# Altium PCB nRF2789_Dual Wireless Mic RX_V_1_0.PcbDoc
Units mil, origin at the board's own origin, x right, y up, seen from the top; angles counter-clockwise.
Board outline 2910 x 2000 mil, 2 copper layers (Top Layer, Bottom Layer); 112 components, 80 nets, 386 pads, 429 vias.
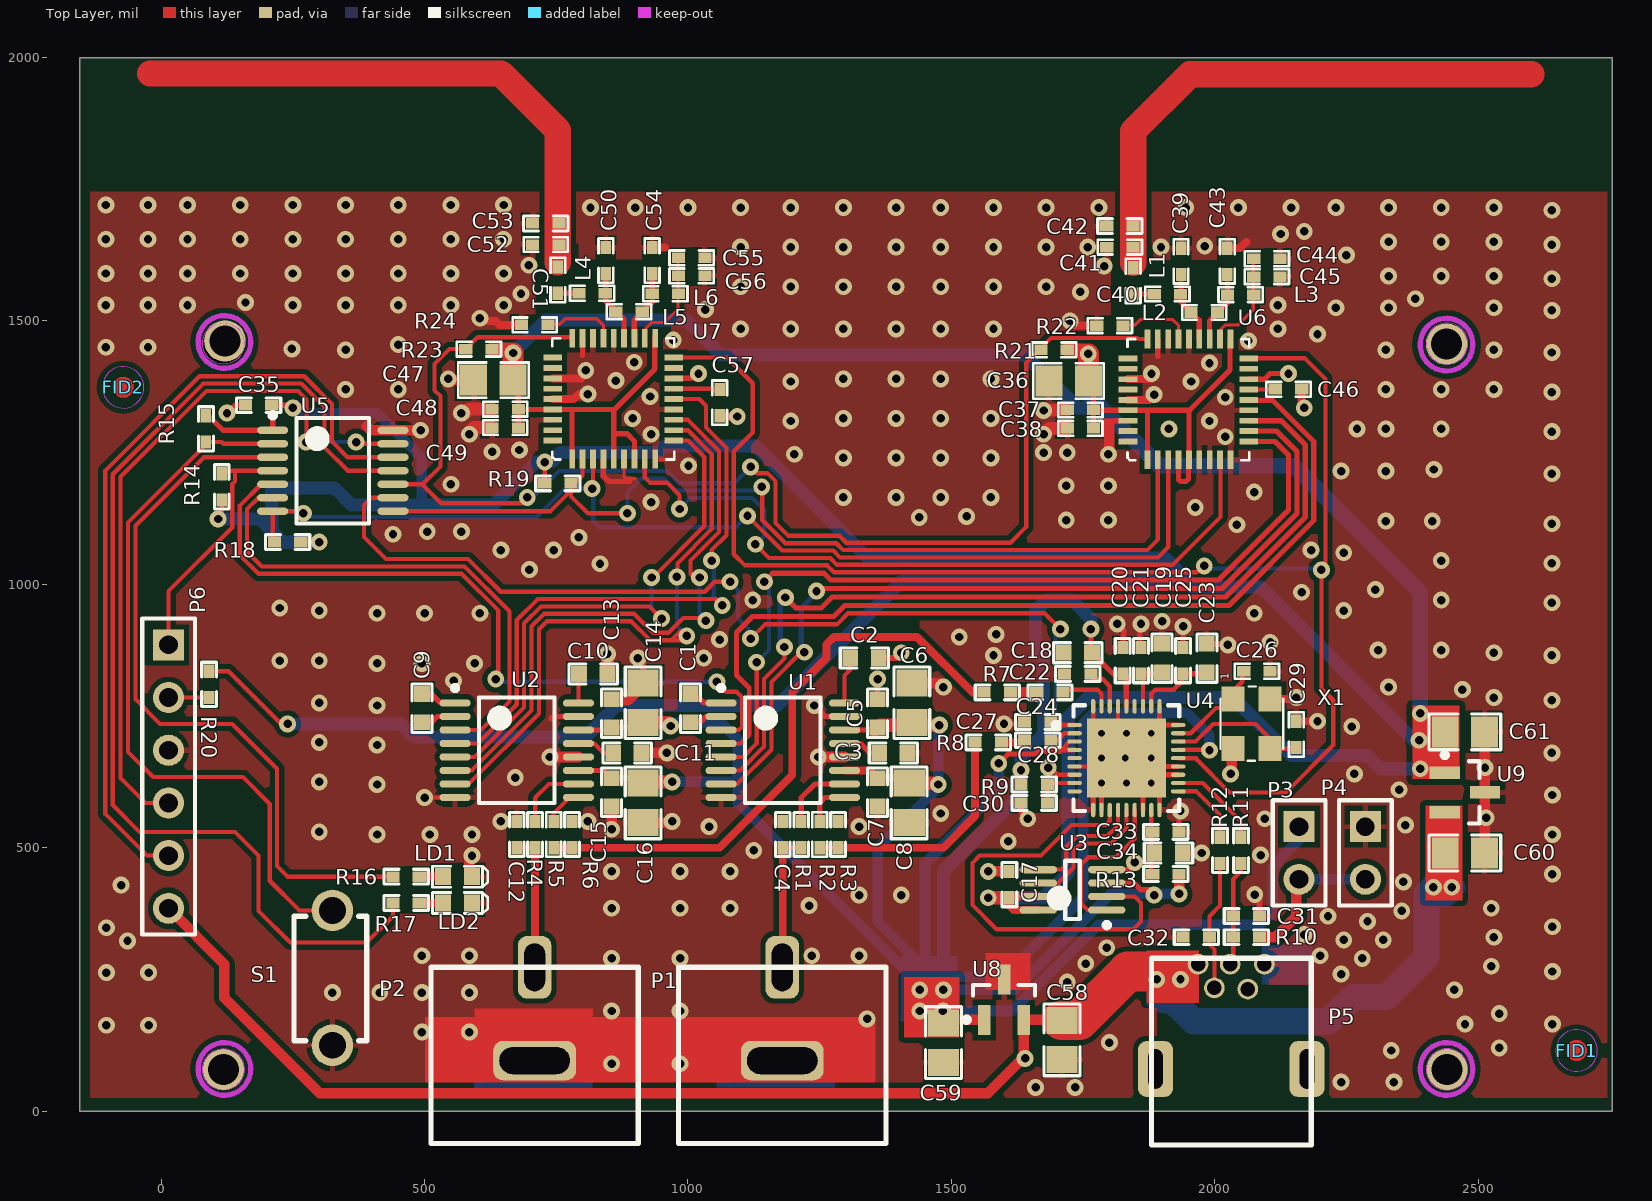
[diagram p0: Top Layer view]
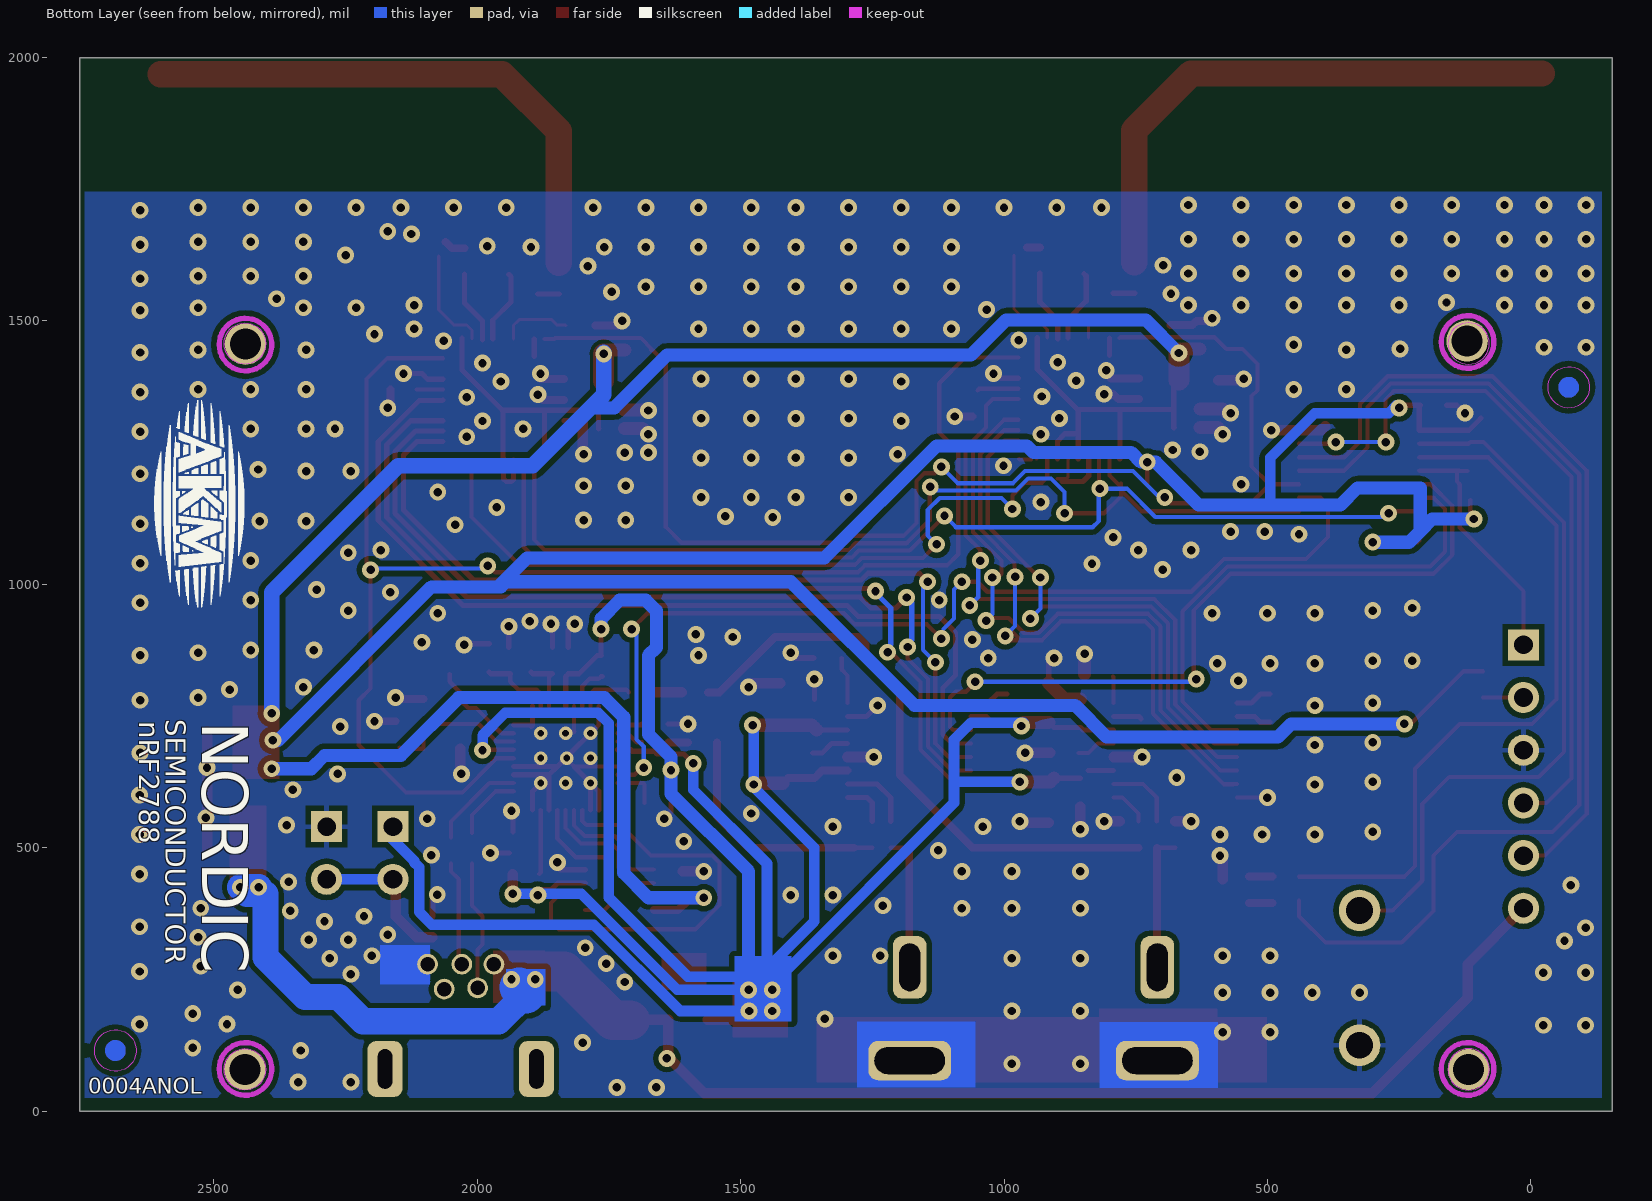
[diagram p1: Bottom Layer view, seen from below]

## Layer stack, top to bottom
Top Layer: signal copper 1.4
Dielectric: dielectric 12.6, FR-4, Dk 4.8
Bottom Layer: signal copper 1.4

## Board outline
-155,0 -155,2000 2755,2000 2755,0
cut-out: 118.11,39.84 cw(c118.11,79.21) 78.74,79.21 cw(c118.11,79.21) 118.11,118.58 cw(c118.11,79.21) 157.48,79.21 cw(c118.11,79.21)
cut-out: 2401.58,79.21 ccw(c2440.95,79.21) 2440.95,39.84 ccw(c2440.95,79.21) 2480.32,79.21 ccw(c2440.95,79.21) 2440.95,118.58 ccw(c2440.95,79.21)
cut-out: 2401.58,1457.17 ccw(c2440.95,1457.17) 2440.95,1417.8 ccw(c2440.95,1457.17) 2480.32,1457.17 ccw(c2440.95,1457.17) 2440.95,1496.54 ccw(c2440.95,1457.17)
cut-out: 118.11,1417.8 cw(c118.11,1457.17) 78.74,1457.17 cw(c118.11,1457.17) 118.11,1496.54 cw(c118.11,1457.17) 157.48,1457.17 cw(c118.11,1457.17)

## Design rules (kind name [scope] priority, off if disabled: settings)
Clearance Clearance_2 [(InNamedPolygon('Bot_GND'))] p1: gap=10
Clearance Clearance_1 [(InNamedPolygon('Top_GND'))] p2: gap=10
Clearance [All] p3: gap=6
ComponentClearance [All] p1: gap=0 collisioncheckmode=3 verticalgap=100000 showdistances=FALSE
HoleSize [All] p1: absolutevalues=TRUE maxlimit=200 minlimit=1 maxpercent=80.000 minpercent=20.000
MinimumSolderMaskSliver [All] p1: minsoldermaskwidth=0
PolygonConnect PolygonConnect_1 [isVia and innet(gnd)] p1: connectstyle=Direct reliefconductorwidth=10 reliefentries=4 polygonreliefangle="90 Angle"
PolygonConnect [All] p2: connectstyle=Relief reliefconductorwidth=10 reliefentries=4 polygonreliefangle="90 Angle"
RoutingVias [All] p1: holewidth=28 width=50 viastyle="Through Hole" minholewidth=28 minwidth=50 maxholewidth=28 maxwidth=50
SilkToSilkClearance [All] p1: silktosilkclearance=0
SilkscreenOverComponentPads [All] p1: minsilkscreentomaskgap=0
SolderMaskExpansion [All] p1: expansion=4
Width [All] p1: maxlimit=300 minlimit=6 preferedwidth=8 minimp=50.000000 maximp=50.000000 favimp=50.000000
23 further rules are at their usual default settings.

## Classes and differential pairs
component class Nrf2460_1: C36 C37 C38 C39 C40 C41 C42 C43 C44 C45 C46 L1 L2 L3 R21 R22 U6
component class Power: C58 C59 C60 C61 U8 U9
component class AK5374: C17 C18 C19 C20 C21 C22 C23 C24 C25 C26 C27 C28 C29 C30 C31 C32 C33 C34 P3 P4 P5 R7 R8 R9 R10 R11 R12 R13 U3 U4 X1
component class Nrf2460_2: C47 C48 C49 C50 C51 C52 C53 C54 C55 C56 C57 L4 L5 L6 R23 R24 U7
component class AK4430_1: C1 C2 C3 C4 C5 C6 C7 C8 P1 R1 R2 R3 U1
component class AK4430_2: C9 C10 C11 C12 C13 C14 C15 C16 P2 R4 R5 R6 U2
component class Micro: C35 LD1 LD2 P6 R14 R15 R16 R17 R18 R19 R20 S1 U5

## Components (designator, comment, footprint, x,y, rotation, side; value= is the part's Value field where it differs from the comment)
C1 "1.0µF" 0603s 1005,765 r90 top
C2 "2.2µF" 0603s 1335,860 r0 top
C3 "2.2µF" 0603s 1390,680 r0 top
C4 "2.2nF" 0402s#1 1180,525 r270 top
C5 "1.0µF" 0603s 1360,755 r270 top
C6 "10µF" 0805#1 1425,775 r270 top
C7 "1.0µF" 0603s 1360,605 r90 top
C8 "10µF" 0805#1 1420,585 r90 top
C9 "1.0µF" 0603s 495,765 r90 top
C10 "2.2µF" 0603s 820,830 r0 top
C11 "2.2µF" 0603s 885,680 r0 top
C12 "2.2nF" 0402s#1 675,525 r270 top
C13 "1.0µF" 0603s 855,755 r270 top
C14 "10µF" 0805#1 915,775 r270 top
C15 "1.0µF" 0603s 855,605 r90 top
C16 "10µF" 0805#1 915,585 r90 top
C17 "100nF" 0402s#1 1610,430 r270 top
C18 "4.7µF" 0603s 1740,870 r180 top
C19 "4.7µF" 0603s 1900,860 r270 top
C20 "100nF" 0402s#1 1825,855 r90 top
C21 "100nF" 0402s#1 1860,855 r270 top
C22 "1.0µF" 0402s#1 1740,830 r0 top
C23 "4.7µF" 0603s 1985,860 r270 top
C24 "1.0µF" 0402s#1 1687.24,795 r0 top
C25 "100nF" 0402s#1 1940,855 r270 top
C26 "15pF" 0402s#2 2105,835 r180 top
C27 "1.0µF" 0402s#1 1664,739 r0 top
C28 "1.0µF" 0402s#1 1664,704 r0 top
C29 "15pF" 0402s#2 2155,740 r270 top
C30 "3.3nF" 0402s#1 1657.24,585 r0 top
C31 "47pF" 0402s#1 2060,370 r0 top
C32 "47pF" 0402s#1 1965,330 r180 top
C33 "100nF" 0402s#1 1907.24,530 r180 top
C34 "4.7µF" 0603s 1912.24,490 r180 top
C35 "100nF" 0402s#1 185,1340 r0 top
C36 "4.7µF" 0805#2 1760,1386 r180 top
C37 "1.0nF" 0402s#2 1770,1331 r180 top
C38 "10nF" 0402s#2 1770,1296 r180 top
C39 "1.2pF" 0402s#2 1936,1588 r90 top
C40 "1.5pF" 0402s#2 1845,1601 r270 top
C41 "1.2pF" 0402s#2 1795,1640 r0 top
C42 "DNM" 0402s#1 1820,1680 r0 top
C43 "1.2pF" 0402s#2 2024,1638 r270 top
C44 "2.2nF" 0402s#2 2124,1618 r180 top
C45 "N.C." 0402s#2 2124,1584 r180 top
C46 "33nF" 0402s#2 2165,1370 r180 top
C47 "4.7µF" 0805#2 668.07,1387.57 r180 top
C48 "1.0nF" 0402s#2 678.07,1332.57 r180 top
C49 "10nF" 0402s#2 678.07,1297.57 r180 top
C50 "1.2pF" 0402s#2 844.07,1589.57 r90 top
C51 "1.5pF" 0402s#2 753.07,1602.57 r270 top
C52 "1.2pF" 0402s#2 705,1645 r0 top
C53 "DNM" 0402s#1 730,1685 r0 top
C54 "1.2pF" 0402s#2 932.07,1639.57 r270 top
C55 "2.2nF" 0402s#2 1032.07,1619.57 r180 top
C56 "N.C." 0402s#2 1032.07,1585.57 r180 top
C57 "33nF" 0402s#2 1060,1320 r90 top
C58 "4.7µF" 0805#1 1710,135 r90 top
C59 "10µF" 0805#1 1485,130 r90 top
C60 "4.7µF" 0805#1 2475,490 r180 top
C61 "10µF" 0805#1 2475,720 r180 top
FID1 "Comment" Fiducial 2687,115 r0 top net-tie
FID2 "Comment" Fiducial -72,1374 r0 top net-tie
L1 "5.6nH" 0402s#2 1935,1551 r180 top
L2 "4.7nH" 0402s#2 1955,1516 r0 top
L3 "8.2nH" 0402s#2 2024,1550 r0 top
L4 "5.6nH" 0402s#2 843.07,1552.57 r180 top
L5 "4.7nH" 0402s#2 863.07,1517.57 r0 top
L6 "8.2nH" 0402s#2 932.07,1551.57 r0 top
LD1 "L0603W" LED_0603 590,445 r180 top
LD2 "L0603W" LED_0603 590,395 r180 top
P1 "Header 2H" RCA 1179,273 r270 top
P2 "Header 2H" RCA 709,273 r270 top
P3 "Header 2" HDR1X2 2160,540 r270 top
P4 "Header 2" HDR1X2 2286,540 r270 top
P5 "Header 5" "Mini USB-B" 2175,80 r90 top
P6 "Header 6" HDR1X6 14,885 r270 top
R1 "470R" 0402s#1 1215,525 r270 top
R2 "22k" 0402s#2 1250,550 r270 top
R3 "11k" 0402s#1 1285,525 r270 top
R4 "470R" 0402s#1 710,525 r270 top
R5 "22k" 0402s#2 745,550 r270 top
R6 "11k" 0402s#1 780,525 r270 top
R7 "1k" 0402s#1 1587.24,795 r180 top
R8 "1k" 0402s#1 1570,700 r180 top
R9 "56k" 0402s#1 1657.24,620 r180 top
R10 "1k5" 0402s#1 2060,330 r0 top
R11 "18R" 0402s#1 2050,495 r270 top
R12 "18R" 0402s#1 2010,495 r270 top
R13 "10R" 0402s#1 1907.24,450 r0 top
R14 "47k" 0402s#1 115,1185 r270 top
R15 "47k" 0402s#1 85,1295 r90 top
R16 "1k" 0402s#1 465,445 r0 top
R17 "1k" 0402s#1 465,395 r0 top
R18 "47k" 0402s#1 240,1080 r180 top
R19 "47k" 0402s#1 753.07,1191.57 r0 top
R20 "0R" 0402s#1 91,810 r270 top
R21 "N.C." 0402s#2 1670,1445 r0 top
R22 "22k" 0402s#2 1776,1491 r0 top
R23 "22k" 0402s#2 578.07,1446.57 r0 top
R24 "22k" 0402s#2 684.07,1492.57 r0 top
S1 "SW-PB" E-Switch 325,125 r90 top
U1 "AK4430" TSOP65P640X110-16N 1180,685 r0 top
U2 "AK4430" TSOP65P640X110-16N 675,685 r0 top
U3 "AK6506C" TSOP65P400X95-8N 1730,420 r180 top
U4 "ak5374" QFN40P500X500X80-36N 1832.24,670 r0 top locked
U5 "PIC16F684-x/SL" TSOP65P640X120-14N 325.83,1215.59 r0 top
U6 "nRF2460" Nordic_QFN36 1950,1351 r90 top
U7 "nRF2460" Nordic_QFN36 858.07,1352.57 r90 top
U8 "lm3480" SOT95P237X112-3N 1600,211.61 r90 top
U9 "lm3480" SOT95P237X112-3N 2475,605 r0 top
X1 "16MHz" BT-XTAL_3225 2070,735 r270 top

## Footprints (in the part's own frame and the unit in brackets; to place one, negate y for a bottom-side part, rotate by r counter-clockwise, add the part's x,y. Pads: shape width x height; smd on the part's side, far side on the other; paste and mask are expansions set on the pad)
0402s#1 [mil] "SMD 0402s footprint"
  rect 25x20 smd: 1(-25,0) 2(25,0)
  silkscreen extent -42,-14 42,14
0402s#2 [mil] "SMD 0402s footprint"
  rect 25x20 smd: 1(0,0) 2(50,0)
  silkscreen extent -17,-14 67,14
0603s [mil] "SMD 0603s footprint"
  rect 30x30 smd: 1(-27,0) 2(27,0)
  silkscreen extent -46,-19 46,19
0805#1 [mm] "SMD 0805 footprint"
  rect 1.3x1.5 smd: 1(-0.95,0) 2(0.95,0)
  silkscreen extent -1.73,-0.86 1.73,0.86
0805#2 [mm] "SMD 0805 footprint"
  rect 1.3x1.5 smd: 1(0,0) 2(1.9,0)
  silkscreen extent -0.75,-0.85 2.65,0.85
BT-XTAL_3225 [mm] "Mercury X32 series"
  rect 1.2x1.1 smd: 1(-1.194,-0.89) 2(1.194,-0.89) 3(1.194,0.888) 4(-1.194,0.891)
  silkscreen extent -1.8,-1.5 1.78,1.52
E-Switch [mm]
  round 2 hole 1.3: 1(0,0) 2(6.5,0)
  silkscreen extent 0.22,-1.65 6.22,1.85
Fiducial [mil] "Fiducial Mark"
  Top Layer circle w19.68: c0,0 r9.87
  Bottom Layer circle w19.68: c0,0 r9.87
  Keep-Out Layer circle w0.39: c0,0 r39.37
HDR1X2 [mm] "Connector; Header; 2 Position"
  rect 1.5x1.5 hole 0.9: 1(0,0)
  round 1.5 hole 0.9: 2(2.54,0)
  silkscreen extent -1.27,-1.27 3.81,1.27
HDR1X6 [mm] "Connector; Header; 6 Position"
  rect 1.5x1.5 hole 0.9: 1(0,0)
  round 1.5 hole 0.9: 2(2.54,0) 3(5.08,0) 4(7.62,0) 5(10.16,0) 6(12.7,0)
  silkscreen extent -1.27,-1.27 13.97,1.27
LED_0603 [mil]
  rect 30x32 smd: 1(0,0) 2(55,0)
  silkscreen extent -30,-20 75,20
"Mini USB-B" [mm]
  rrect50% 2.7x1.7 hole 0.7 slot 1.9 at 0 deg: 0(0,7.3) 0(0,0)
  round 1 hole 0.7: 1(5.05,5.25) 2(3.907,4.463) 3(5.05,3.701) 4(3.85,2.85) 5(5.05,2.05)
  silkscreen extent -3.67,-0.21 5.35,7.49, body extent -3.74,-0.08 5.26,7.62, height 3.4
Nordic_QFN36 [mm]
  rect 0.9x0.28 smd: 1(-2.916,1.975) 2(-2.916,1.475) 3(-2.916,0.975) 4(-2.916,0.475) 5(-2.916,-0.025) 6(-2.916,-0.525) 7(-2.916,-1.025) 8(-2.916,-1.525) 9(-2.916,-2.025) 19(2.916,-2.025) 20(2.916,-1.525) 21(2.916,-1.025) 22(2.916,-0.525) 23(2.916,-0.025) 24(2.916,0.475) 25(2.916,0.975) 26(2.916,1.475) 27(2.916,1.975)
  rect 0.28x0.9 smd: 10(-2.025,-2.916) 11(-1.525,-2.916) 12(-1.025,-2.916) 13(-0.525,-2.916) 14(-0.025,-2.916) 15(0.475,-2.916) 16(0.975,-2.916) 17(1.475,-2.916) 18(1.975,-2.916) 28(1.975,2.916) 29(1.475,2.916) 30(0.975,2.916) 31(0.475,2.916) 32(-0.025,2.916) 33(-0.525,2.916) 34(-1.025,2.916) 35(-1.525,2.916) 36(-2.025,2.916)
  silkscreen extent -2.94,-2.94 2.91,2.94
QFN40P500X500X80-36N [mm] "QFN, 36-Leads, Body 5,1x5,1mm (max), Pitch 0,40mm, IPC Medium Density"
  oval 0.7x0.2 smd: 1(-2.5,1.6) 2(-2.5,1.2) 3(-2.5,0.8) 4(-2.5,0.4) 5(-2.5,0) 6(-2.5,-0.4) 7(-2.5,-0.8) 8(-2.5,-1.2) 9(-2.5,-1.6) 19(2.5,-1.6) 20(2.5,-1.2) 21(2.5,-0.8) 22(2.5,-0.4) 23(2.5,0) 24(2.5,0.4) 25(2.5,0.8) 26(2.5,1.2) 27(2.5,1.6)
  oval 0.2x0.7 smd: 10(-1.6,-2.5) 11(-1.2,-2.5) 12(-0.8,-2.5) 13(-0.4,-2.5) 14(0,-2.5) 15(0.4,-2.5) 16(0.8,-2.5) 17(1.2,-2.5) 18(1.6,-2.5) 28(1.6,2.5) 29(1.2,2.5) 30(0.8,2.5) 31(0.4,2.5) 32(0,2.5) 33(-0.4,2.5) 34(-0.8,2.5) 35(-1.2,2.5) 36(-1.6,2.5)
  rect 3.8x3.8 smd: 37(0,0)
  silkscreen extent -3.52,-2.55 2.55,2.55, body extent -2.55,-2.55 2.55,2.55, height 0.8
RCA [mm]
  rrect50% 3x1.6 hole 1 slot 2.3 at 0 deg: 1(0,0)
  rrect50% 1.9x4 hole 1.3 slot 3.4 at 90 deg: 2(4.5,0)
  silkscreen extent 0,-5 8.5,5
SOT95P237X112-3N [mm] "SOT23, 3-Leads, Body 3,0x2,6mm (max), Pitch 0,95mm, IPC Medium Density"
  rect 1.45x0.6 smd: 1(-0.975,0.953) 2(-0.975,-0.953) 3(0.975,0)
  silkscreen extent -1.1,-1.5 0.7,1.93, body extent -0.7,-1.52 0.7,1.52, height 1.12
TSOP65P400X95-8N [mm] "TSOP, 8-Leads, Body 2.8x2.8mm (max), Pitch 0.65mm, IPC Medium Density"
  oval 1.8x0.35 smd: 1(-1.65,0.975) 2(-1.65,0.325) 3(-1.65,-0.325) 4(-1.65,-0.975) 5(1.65,-0.975) 6(1.65,-0.325) 7(1.65,0.325) 8(1.65,0.975)
  silkscreen extent -1.78,-1.4 0.95,1.82, body extent -1.4,-1.4 1.4,1.4, height 0.95
TSOP65P640X110-16N [mm] "TSOP, 16-Leads, Body 5,1x4,5mm (max), Pitch 0,65mm, IPC Medium Density"
  oval 1.5x0.35 smd: 1(-2.975,2.275) 2(-2.975,1.625) 3(-2.975,0.975) 4(-2.975,0.325) 5(-2.975,-0.325) 6(-2.975,-0.975) 7(-2.975,-1.625) 8(-2.975,-2.275) 9(2.975,-2.275) 10(2.975,-1.625) 11(2.975,-0.975) 12(2.975,-0.325) 13(2.975,0.325) 14(2.975,0.975) 15(2.975,1.625) 16(2.975,2.275)
  silkscreen extent -3.1,-2.55 1.83,3.12, body extent -2.25,-2.55 2.25,2.55, height 1.1
TSOP65P640X120-14N [mm] "TSOP, 14-Leads, Body 5,1x4,5mm (max), Pitch 0,65mm, IPC Medium Density"
  oval 1.5x0.35 smd: 1(-2.9,1.95) 2(-2.9,1.3) 3(-2.9,0.65) 4(-2.9,0) 5(-2.9,-0.65) 6(-2.9,-1.3) 7(-2.9,-1.95) 8(2.9,-1.95) 9(2.9,-1.3) 10(2.9,-0.65) 11(2.9,0) 12(2.9,0.65) 13(2.9,1.3) 14(2.9,1.95)
  silkscreen extent -3.02,-2.55 1.75,2.8, body extent -2.25,-2.55 2.25,2.55, height 1.2

## Part data
C1 C5 C7 C9 C13 C15: library part C0603-1µ0, "Chip Cap 0603"
C2 C3 C10 C11: library part C0603-2µ2, "Chip Cap 0603"
C4 C12 C44 C55: library part C0402-2n2, "Chip Cap 0402"
C6 C8 C14 C16 C59 C61: library part C0805-10µ, "Chip Cap 0805"
C17 C20 C21 C25 C33 C35: library part C0402-100n, "Chip Cap 0402"
C18 C19 C23 C34: library part C0603-4µ7, "Chip Cap 0603"
C22 C24 C27 C28: library part C0402-1µ0, "Chip Cap 0402"
C26 C29: library part C0402-15p, "Chip Cap 0402"
C30: library part C0402-3n3, "Chip Cap 0402"
C31 C32: library part C0402-47p, "Chip Cap 0402"
C36 C47 C58 C60: library part C0805-4µ7, "Chip Cap 0805"
C37 C48: library part C0402-1n0, "Chip Cap 0402"
C38 C49: library part C0402-10n, "Chip Cap 0402"
C39 C41 C42 C43 C50 C52 C53 C54: library part C0402-1.2p, "Chip Cap 0402"
C40 C51: library part C0402-1.5p, "Chip Cap 0402"
C45 C56: library part C0402-N.C., "Chip Cap 0402"
C46 C57: library part C0402-33n, "Chip Cap 0402"
FID1 FID2: library part Fid-Mark
L1 L4: library part L0402-5n6, "Chip Ind 0402"
L2 L5: library part L0402-4n7, "Chip Ind 0402"
L3 L6: library part L0402-8n2, "Chip Ind 0402"
LD1 LD2: library part 19-213/W1D, "LED 0603, 19-213/W1D"
P1 P2: "Header, 2-Pin, Right Angle"
P3 P4: "Header, 2-Pin"
P5: "Header, 5-Pin"
P6: "Header, 6-Pin"
R1 R4: library part R0402-470, "Chip Res 0402"
R2 R5 R22 R23 R24: library part R0402-22k, "Chip Res 0402"
R3 R6: library part R0402-10k, "Chip Res 0402"
R7 R8 R16 R17: library part R0402-1k0, "Chip Res 0402"
R9: library part R0402-56k, "Chip Res 0402"
R10: library part R0402-1k5, "Chip Res 0402"
R11 R12: library part R0402-18R, "Chip Res 0402"
R13: library part R0402-10R, "Chip Res 0402"
R14 R15 R18 R19: library part R0402-47k, "Chip Res 0402"
R20: library part R0402-0R, "Chip Res 0402"
R21: library part R0402-N.C., "Chip Res 0402"
S1: "Switch"
U6 U7: "2.4GHz Single Chip Wireless Audio Streamer"
X1: library part "XTAL SMD 16MHz (3225)", "XTAL SMD 16MHz, 9pF, Mercury"

## Free pads (board coordinates)
  round 78.74 hole 59.06: 0(118,79) 0(121,1462) 0(2440,1456) 0(2441,79)

## Via types
v1: diameter 32, hole 16, Top Layer to Bottom Layer, tented top, 420 vias
v2: diameter 25.98, hole 12.99, Top Layer to Bottom Layer, tented top, 9 vias

## Nets (pads, with @x,y where several pads share a name; then routed paths per layer and width w, separated by ;. In a path a pad name is that pad's centre, name@x,y a point inside that pad or via, vN(x,y) a via of type N, cw(c..) or ccw(c..) an arc to the next point about the centre after c; other vN are vias at no path point)
GND: C2.2 C3.2 C4.1 C5.1 C6.1 C7.1 C8.1 C10.2 C11.2 C12.1 C13.1 C14.1 C15.1 C16.1 C17.1 C18.2 C19.1 C20.2 C21.1 C22.1 C23.1 C25.1 C26.1 C27.1 C29.1 C30.1 C31.2 C32.2 C33.1 C34.1 C35.1 C36.2 C37.2 C38.2 C39.2 C41.1 C42.1 C43.1 C44.1 C45.1 C46.1 C47.2 C48.2 C49.2 C50.2 C52.1 C53.1 C54.1 C55.1 C56.1 C57.1 C58.1 C59.1 C60.1 C61.1 LD1.1 LD2.1 P1.2 P2.2 P4.1 P5.5 P6.3 R3.1 R6.1 R22.1 R24.1 S1.1 U1.8 U1.12 U1.15 U2.8 U2.12 U2.15 U3.4 U4.6 U4.10 U4.11 U4.16 U4.18 U4.21 U4.22 U4.27 U4.28 U4.33 U4.36 U4.37 U5.14 U6.6 U6.7 U6.9 U6.13 U6.16 U6.23 U6.25 U6.26 U6.30 U6.32 U6.34 U7.4 U7.6 U7.9 U7.13 U7.16 U7.23 U7.25 U7.26 U7.30 U7.32 U7.34 U8.3 U9.3 X1.2 X1.4 | length 3840.8
  Top Layer w6: U7.6@878.07,1237.09 U7.6 878.74,1203.38 881.79,1200.33 899.67,1200.33 ; U7.9 U7.9@938.07,1238.04 ; U6.6@1970,1235.52 U6.6 ; U6.9 U6.9@2030,1236.47
  Top Layer w8: v1@510.43,595.43 U2.8 ; 949,1237 970,1237 971,1238 ; U4.6 1816.5,654.25 U4.37 ; U4.36 1769.25,732.99 U4.37@1774.62,727.62 ; U4.37@1816.5,720.75 U4.33
  Top Layer w10: v1@130,1330 140,1340 C35.1 ; 740,745 743.98,748.98 U2.15 ; 800,1435 U7.26 ; U7.4 839.37,1205.63 850,1195 890,1195 ; v1(905,860) 915,850 C14.1 ; U7.16 1005.96,1390.96 v1@1010,1395 ; v1(1240,770) 1261.02,748.98 U1.15 ; C5.1 v1@1360,810 ; C6.1@1425,807.4 v1@1472.6,807.4 ; v1(1600,735) C27.1@1637.24,735 ; C30.1 1632.24,567.76 v1@1635,565 ; U4.10 1769.25,607.01 v2(1785,622.76) ; U4.37@1774.62,727.62 U4.37 U4.37@1847.99,654.25 ; U4.11 v2(1785,622.76) ; U3.4 1843.39,458.39 1850,465 1850,480 1848,478 v1(1848,472) ; 1810.64,1310.64 U6.34 ; v1(1815,925) 1827.24,912.76 C20.2@1827.24,880 ; U4.37@1816.5,654.25 v2(1785,622.76) ; U4.37@1816.5,720.75 U4.37@1817.24,720 ; C21.1@1857.24,880 1857.24,907.24 ; U4.16 U4.37@1863.74,638.5 ; 1891.93,1433.07 U6.26 ; U4.18 1895.24,607.01 U4.37@1863.74,638.5 ; U4.28 U4.37@1895.24,732.01 ; U4.37@1897.24,730 U4.37@1895.24,732.01 ; U4.21 U4.37@1863.74,638.5 ; U4.22 U4.37@1847.99,654.25 ; U4.27 1896.22,732.99 U4.37@1895.24,732.01 ; C33.1 1932.24,567.24 v1(1935,570) ; C34.1 v1(1975,490) ; C25.1 v1(1940,920) ; C23.1@1977.24,887 C23.1 v1@2018,887 ; v1(2020,1355) v1@2020,1363.31 ; U6.16 2094.39,1389.39 2105,1400 v1(2140,1400) ; U4.37@1847.99,654.25 U4.37@1863.74,638.5 ; v1(1975,490) 1975,495 1970,500 1970,495 v1(1975,490)
  Top Layer w12: C2.2 1395,860 v1(1405,870) ; C31.2 v1@2085,400
  Top Layer w15: v1@615,1500 634.64,1500 642.07,1492.57 R24.1 ; U7.32 783.09,1351.59 793.07,1361.57 796.54,1358.11 799.43,1361 v1(810,1361) ; U7.30 797.46,1390.96 806,1399.5 v1(806,1406) ; C54.1 956.07,1639.57 ; C57.1@1060,1318.57 v1(1093.57,1318.57) v1@1095,1320 ; v1(1725,1500) 1734,1491 R22.1 ; U6.32 1875.01,1350.01 v1(1885,1360) ; U6.30 1879.39,1389.39 v1@1880,1390 ; C43.1 2048,1638 2060,1650 ; X1.4@2102.3,782.01 X1.4 v1@2147.99,782.01 ; C29.1 v1(2195,740) ; C46.1 2165,1330 v1(2170,1335)
  Top Layer w20: 390,1300 397.64,1292.36 U5.14 v1(492.36,1292.36) ; v1@552.57,1387.57 C47.2 ; LD1.1@585,440 v1@585,480 ; v1(590,485) v1@595,485 ; v1(645,550) C12.1 ; v1(737.8,672.2) U2.12 ; R6.1 v1(810,550) ; v1(855,535) C15.1 ; C11.2 v1(960,680) ; C16.1 v1@967.6,547.6 ; v1(1247.2,672.2) U1.12 ; C6.1 1477.6,812.4 v1(1485,805) ; v1(1570,455) C17.1 ; v1(2030,640) 2032.19,642.19 X1.2@2032.19,687.99 ; C60.1 U9.3@2512.4,604.02 ; C61.1 2512.4,605.98 U9.3
  Top Layer w25: v1(570,1325) 576.5,1325 584.07,1332.57 C48.2 ; v1(585,1285) 585,1288.5 594.07,1297.57 C49.2 ; C10.2 v1(847,868) ; C13.1 884.6,782 C14.1 ; v1(1675,1285) 1686,1296 C38.2 ; v1(1675,1330) 1676,1331 C37.2
  other v1: 1660,45 1735,45 2240,55 2340,55 855,90 985,90 2335,115 2540,120 1800,130 495,150 585,150 -104,163 -24,163 2475,165 2641,165 1340,175 2540,185 855,190 985,190 325,225 415,225 495,225 585,225 2455,230 1720,245 2240,260 -104,263 -24,263 2641,265 2525,275 1755,280 855,290 985,290 2280,290 495,295 585,295 1235,295 1325,295 2200,295 1795,310 -64,323 2245,325 2320,325 2530,330 2170,335 -104,348 2641,350 2290,360 2215,370 2355,380 855,385 985,385 1080,385 2525,385 1230,390 1325,410 1405,410 2076,411 -76,429 2358,435 2641,450 855,455 985,455 1080,455 2087,486 1125,495 1608,512 410,525 510,525 590,525 2641,525 300,530 1040,540 1325,540 2362,543 970,550 1645,555 2095,555 2515,557 1480,565 500,595 2641,600 2350,610 410,620 300,625 672,633 2265,640 2513,652 2640,680 410,695 300,700 2260,730 410,770 300,775 2640,780 2155,785 2530,785 2470,800 2330,805 555,817 1360,820 410,850 495,850 595,850 225,855 300,855 1030,860 1580,865 2640,865 2530,870 2310,875 2430,875 2025,885 2105,890 1060,895 1515,900 1585,905 1860,925 1900,930 410,945 500,945 605,945 2075,945 300,950 2245,950 225,955 2640,965 1123,970 2430,970 2165,985 2305,990 699,1028 833,1039 2640,1040 2430,1045 2245,1060 645,1065 745,1065 2183,1065 793,1089 440,1095 505,1100 570,1100 2042,1113 2640,1115 2325,1120 2413,1120 1718,1122 1798,1122 1439,1127 1529,1129 1963,1146 930,1156 1295,1165 1395,1165 1480,1165 1575,1165 2075,1175 1718,1187 1798,1187 550,1190 2640,1210 2240,1215 2325,1215 2416,1218 1001,1225 1295,1240 1395,1240 1480,1240 1575,1240 1202,1247 1798,1247 1675,1250 1720,1250 628.07,1251.57 680,1255 2020,1280 930,1285 2640,1290 1913,1295 2270,1295 2325,1295 2430,1295 1195,1310 1990,1310 895,1315 1295,1315 1395,1315 1480,1315 1575,1315 125,1325 928.07,1356.57 2640,1365 350,1370 450,1370 2325,1370 2430,1370 2530,1370 1195,1385 1955,1385 863.07,1386.57 545,1390 1295,1390 1395,1390 1480,1390 1575,1390 1020,1400 1880,1400 1990,1420 898.07,1421.57 2640,1440 350,1445 2325,1445 2530,1445 248,1447 -105,1450 -25,1450 450,1455 2064,1462 972.07,1463.57 2195,1475 1100,1485 1195,1485 1295,1485 1395,1485 1480,1485 1580,1485 2120,1485 605,1505 2640,1520 1033.07,1521.57 2230,1525 2330,1525 2530,1525 -105,1530 -25,1530 50,1530 250,1530 350,1530 450,1530 550,1530 650,1530 2120,1530 160,1535 2381,1542 683.07,1551.57 1745,1555 1100,1565 1195,1565 1295,1565 1395,1565 1480,1565 1580,1565 1680,1565 2640,1580 2330,1585 2430,1585 2530,1585 -105,1590 -25,1590 50,1590 150,1590 250,1590 350,1590 450,1590 550,1590 650,1590 1790,1604 698.07,1605.57 2250,1625 1100,1640 1195,1640 1295,1640 1395,1640 1480,1640 1580,1640 1680,1640 1759,1640 1898,1640 1981,1642 2640,1645 2330,1650 2430,1650 2530,1650 -105,1655 -25,1655 50,1655 150,1655 250,1655 350,1655 450,1655 550,1655 650,1655 2125,1665 2170,1670 2640,1710 815,1715 900,1715 1000,1715 1100,1715 1195,1715 1295,1715 1395,1715 1480,1715 1580,1715 1680,1715 1780,1715 1945,1715 2045,1715 2145,1715 2230,1715 2330,1715 2430,1715 2530,1715 -105,1720 -25,1720 50,1720 150,1720 250,1720 350,1720 450,1720 550,1720 650,1720
  other v2: 1832.24,622.76 1879.49,622.76 1785,670 1830,670 1879.49,670 1785,717.24 1832.24,717.24 1879.49,717.24
ICSPCLK: P6.5 U5.12 | length 1530.5
  Top Layer w8: P6.5 -27,485 -106,564 -106,1216 73,1395 271.6,1395 324,1342.6 324,1271 353.82,1241.18 U5.12
ICSPDAT: P6.4 U5.13 | length 1357.5
  Top Layer w8: P6.4 -30,585 -77,632 -77,1204.2 85.8,1367 260,1367 276,1351 276,1271 v1(275,1270) ; v1(370,1270) 373.23,1266.77 U5.13
  Bottom Layer w8: v1(275,1270) v1(370,1270)
MCLR: P6.1 R14.1 U5.4 | length 478.3
  Top Layer w8: P6.1 14,987 135,1108 135,1190 140,1195 140,1215 R14.1@120,1215 ; 135.59,1215.59 U5.4
NetC1_1: C1.1 U1.2 | length 72.4
  Top Layer w10: C1.1@995,738 1023,738 1033.98,748.98 U1.2
NetC1_2: C1.2 U1.1 | length 75.1
  Top Layer w10: C1.2@995,792 1013,792 1030.43,774.57 U1.1
NetC2_1: C2.1 U1.16 | length 89.9
  Top Layer w8: U1.16 1297.13,827.13 1308,838 C2.1
NetC3_1: C3.1 U1.13 | length 73.2
  Top Layer w10: U1.13 1327.2,697.8 1345,680 C3.1
NetC4_2: C4.2 P1.1 R1.2 | length 250
  Top Layer w8: C4.2 R1.2
  Top Layer w15: P1.1@1180,285 1180,290 C4.2
NetC9_1: C9.1 U2.2 | length 67.4
  Top Layer w10: C9.1 513,738 523.98,748.98 U2.2
NetC9_2: C9.2 U2.1 | length 70.1
  Top Layer w10: C9.2 513,792 530.43,774.57 U2.1
NetC10_1: C10.1 U2.16 | length 50.8
  Top Layer w8: U2.16 792.13,824.13 C10.1@793,825
NetC11_1: C11.1 U2.13 | length 73.2
  Top Layer w8: U2.13 822.2,697.8 840,680 C11.1
NetC12_2: C12.2 P2.1 R4.2 | length 245
  Top Layer w8: C12.2 R4.2
  Top Layer w15: P2.1@710,290 R4.2
NetC19_2: C19.2 C21.2 U4.30 | length 105.5
  Top Layer w8: C21.2@1857.24,830 1863.74,823.5 U4.30
  Top Layer w10: C21.2@1857.24,830 1894.24,830 C19.2@1897.24,833
NetC22_2: C22.2 U4.34 | length 84.2
  Top Layer w8: C22.2@1765,825 1769.38,820.62 1786.62,820.62 1800.75,806.5 U4.34
  Top Layer w10: C22.2@1762.24,825 C22.2@1765,825
NetC23_2: C23.2 C25.2 U4.29 | length 147.2
  Top Layer w8: U4.29 1879.49,792.24 1887.24,800 1922.24,800 1937.24,815 C25.2@1937.24,830
  Top Layer w10: C25.2@1937.24,830 C25.2 1974.24,830 C23.2@1977.24,833
NetC24_1: C24.1 R7.1 | length 50
  Top Layer w20: R7.1 C24.1
NetC24_2: C24.2 U4.35 | length 101.9
  Top Layer w8: C24.2 1717.24,800 1777.24,800 1785,792.24 U4.35
NetC26_2: C26.2 U4.26 X1.1 | length 185.9
  Top Layer w8: U4.26 1954.49,717.24 2002.19,764.94 2017.19,764.94 2032.19,779.94 2032.19,782.01 2032.19,794.94 2052.24,815 C26.2@2052.24,830
NetC27_2: C27.2 U4.1 | length 47.4
  Top Layer w10: C27.2@1687.24,735 1689.25,732.99 U4.1
NetC28_1: C28.1 R8.1 | length 37.2
  Top Layer w15: R8.1@1600,700 C28.1@1637.24,700
NetC28_2: C28.2 U4.2 | length 53.7
  Top Layer w8: C28.2@1687.24,700 1697.24,700 1714.49,717.24 U4.2
NetC29_2: C29.2 U4.25 X1.3 | length 263.7
  Top Layer w8: U4.25 1963.74,701.5 1997.24,735 2077.24,735 2102.19,710.06 2102.19,687.99 2145.24,687.99 C29.2@2147.24,690
NetC30_2: C30.2 R9.1 U4.8 | length 87.7
  Top Layer w8: C30.2 R9.1 1685,622.76 U4.8
NetC31_1: C31.1 P5.3 R10.1 R11.2 | length 199.8
  Top Layer w8: P5.3 2035,284.53 R10.1 C31.1 2035,440 2050,455 R11.2
NetC32_1: C32.1 P5.2 R12.2 | length 248.3
  Top Layer w8: P5.2 1999.29,306.71 1990,316 C32.1 1990,370 2010,390 R12.2
NetC33_2: C33.2 C34.2 R13.1 U4.17 | length 122.7
  Top Layer w8: U4.17 1879.49,452.76 R13.1
NetC39_1: C39.1 L1.1 L2.1 U6.22 | length 138.2
  Top Layer w10: C39.1@1940,1588 1936,1584 1936,1536 1970.67,1501.33 U6.22
NetC40_1: C40.1 C41.2 C42.2 | length 1087.7
  Top Layer w10: C40.1 1845,1610 C41.2@1845,1638
  Top Layer w50: C40.1@1845,1610 C42.2 1845,1860 1953,1968 2601,1968
NetC40_2: C40.2 L1.2 | length 41
  Top Layer w10: C40.2@1844,1551 C40.2 L1.2
NetC43_2: C43.2 L2.2 L3.1 U6.21 | length 139.1
  Top Layer w10: U6.21@1990,1464 1990,1500 2024,1534 L3.1 C43.2 C43.2@2024,1589
NetC44_2: C44.2 C45.2 L3.2 U6.20 | length 197.4
  Top Layer w6: U6.20 2010.04,1482.08 2020.48,1492.53 2044.53,1492.53 2073,1521 C44.2@2073,1623
NetC46_2: C46.2 U6.15 | length 50.3
  Top Layer w8: U6.15 2114.7,1369.7 C46.2
NetC50_1: C50.1 L4.1 L5.1 U7.22 | length 138.2
  Top Layer w10: C50.1@848.07,1589.57 844.07,1585.57 844.07,1537.57 878.74,1502.9 U7.22
NetC51_1: C51.1 C52.2 C53.2 | length 1068.8
  Top Layer w50: -21,1969.57 645.07,1969.57 753.07,1861.57 C51.1@753.07,1611.57
NetC51_2: C51.2 L4.2 | length 41
  Top Layer w10: C51.2@752.07,1552.57 C51.2 L4.2
NetC54_2: C54.2 L5.2 L6.1 U7.21 | length 139.1
  Top Layer w10: U7.21@898.07,1465.57 898.07,1501.57 932.07,1535.57 L6.1 C54.2 C54.2@932.07,1590.57
NetC55_2: C55.2 C56.2 L6.2 U7.20 | length 197.4
  Top Layer w6: U7.20 918.11,1483.65 931.46,1497 955.5,1497 981.07,1522.57 C55.2@981.07,1624.57
NetC57_2: C57.2 U7.15 | length 78.3
  Top Layer w8: U7.15 1047.37,1371.27 C57.2@1050.07,1368.57
NetLD1_2: LD1.2 R16.2 | length 45
  Top Layer w15: R16.2 LD1.2
NetLD2_2: LD2.2 R17.2 | length 45
  Top Layer w15: R17.2 LD2.2
NetP3_2: P3.2 P4.2 R10.2 | length 271.6
  Top Layer w20: R10.2 2115,330 2155,370 P3.2@2155,445
  Bottom Layer w20: P3.2 P4.2@2270,440
NetP6_2: P6.2 R20.2 | length 77
  Top Layer w8: P6.2 R20.2
NetR1_1: R1.1 U1.10 | length 137.9
  Top Layer w10: R1.1 1215,595 1241.02,621.02 U1.10
NetR2_1: R2.1 U1.9 | length 86.4
  Top Layer w10: R2.1 1250,585 1260.43,595.43 U1.9
NetR2_2: R2.2 R3.2 R8.2 | length 459.9
  Top Layer w8: R2.2 R3.2
  Top Layer w15: R3.2 1485,500 1545,560 R8.2
NetR4_1: R4.1 U2.10 | length 137.9
  Top Layer w8: R4.1 710,595 736.02,621.02 U2.10
NetR5_1: R5.1 U2.9 | length 74.7
  Top Layer w8: R5.1 745,565 775.43,595.43 U2.9
NetR5_2: R5.2 R6.2 R7.2 | length 1133.6
  Top Layer w15: R5.2 R6.2 1060,500 1198,638 1198,795 1263,860 1263,886 1277,900 1435,900 1540,795 R7.2
NetR11_1: R11.1 U4.20 | length 179.5
  Top Layer w8: U4.20 1977.24,622.76 2050,550 R11.1
NetR12_1: R12.1 U4.19 | length 132.4
  Top Layer w8: U4.19 1965.24,607.01 2010,562.24 R12.1@2010,527.76
NetR15_1: R15.1 S1.2 U5.2 | length 1372.5
  Top Layer w8: U5.2 118.23,1266.77 115,1270 90,1270 -63,1117 -63,682 -15,634 155,634 206,583 206,437.2 262.3,380.91 S1.2
NetR16_1: R16.1 U5.3 | length 1380.7
  Top Layer w8: U5.3 80.98,1241.18 -49,1111.2 -49,782 -2,735 135,735 220,650 220,465 240,445 R16.1
NetR17_1: R17.1 U5.11 | length 2097.1
  Top Layer w8: R17.1@440,400 R17.1 440,370 390,320 245,320 185,380 185,485 140,530 -41,530 -92,581 -92,1209 80,1381 265.8,1381 310,1336.8 310,1260 354.41,1215.59 U5.11
NetR18_2: R18.2 U5.7 U6.3 U7.3 | length 2119.2
  Top Layer w8: R18.2 211.65,1083.35 U5.7 v1@261.18,1138.82 ; v1(818.07,1181.57) 819.69,1183.19 U7.3 ; v1(1113,1130) 1179,1064 1275.81,1064 1288.81,1051 1892,1051 1911.61,1070.61 U6.3
  Bottom Layer w8: v1(270,1135) 277,1128 713,1128 766.57,1181.57 v1(818.07,1181.57) v1@820,1179.64 ; v1@820,1185 v1@820,1179.64 ; v1(1113,1130) 1091.5,1108.5 831.5,1108.5 820,1120 v1@820,1179.64
NetR19_2: R19.2 U5.8 U6.2 U7.2 | length 1877.1
  Top Layer w8: U5.8 738.82,1138.82 778.07,1178.07 ; R19.2 R19.2@778.07,1184.64 ; U7.2 800,1206.57 R19.2@778.07,1184.64 ; v1(885,1135) 810,1135 778.07,1166.93 778.07,1178.07 ; v1(1140,1185) 1141,1184 1141,1121.8 1184.8,1078 1281.61,1078 1294.61,1065 1872,1065 1891.93,1084.93 U6.2 ; 778.07,1178.07 R19.2@778.07,1184.64
  Bottom Layer w8: v1(885,1135) 885,1175 911,1201 954.2,1201 977.2,1178 1133,1178 v1(1140,1185)
NetR21_1: R21.1 R23.1 U5.10 U6.27 U7.27 | length 2478.6
  Top Layer w8: U5.10 495,1190 ; v1(695,1165) 684,1154 531,1154 495,1190 ; U7.27 778.63,1469.07 600.57,1469.07 R23.1 547.57,1446.57 519,1418 519,1368.23 530,1357.23 530,1223.64 496.36,1190 495,1190 ; v1(1119,1223) 1131,1211 1150.77,1211 1166,1195.77 1166,1116.6 1190.6,1092 1287.41,1092 1300.41,1079 1612,1079 1642,1109 1642,1420 R21.1@1667,1445 ; R21.1 R21.1@1667,1445 ; U6.27 1854,1465.81 1852.31,1467.5 1689.5,1467.5 R21.1@1667,1445
  Bottom Layer w8: v1(695,1165) 705,1165 755,1215 960,1215 983,1192 1088,1192 v1(1119,1223)
NetR22_2: R22.2 U6.24 | length 134.4
  Top Layer w6: R22.2@1832,1491 1833,1492 1848.33,1492 1858.86,1502.53 1920.47,1502.53 1931.3,1491.7 U6.24
NetR24_2: R24.2 U7.24 | length 133.5
  Top Layer w6: R24.2@740.07,1492.57 741.07,1493.57 756.41,1493.57 766.93,1504.1 826.9,1504.1 839.37,1491.63 U7.24
NetU1_3: U1.3 U5.5 | length 1423.6
  Top Layer w8: U5.5 190,1190 149,1149 149,1056 185,1020 570,1020 640,950 640,820 v1(635,820) ; v1(1055,815) 1055,813 1072,796 1092,796 1102.4,785.6 1102.4,729.4 1096.39,723.39 U1.3
  Bottom Layer w8: v1(635,820) 640,815 v1(1055,815)
NetU1_4: U1.4 U6.14 | length 1753.8
  Top Layer w8: U1.4 1099.8,697.8 1116.4,714.4 1116.4,804
  Top Layer w10: 1115.4,804 1092,827.4 1092,908.18 1122.82,939 1276.63,939 1297.63,960 2026.82,960 2188,1121.18 2188,1271 2110,1349 2065.83,1349 U6.14
NetU1_5: U1.5 U6.10 | length 1659.7
  Top Layer w8: U1.5 1105,672.2 1130.4,697.61 v1(1130.4,852) v1@1130.4,860.4
  Top Layer w10: v1(1145,1005) 1161,1021 1258,1021 1271,1008 2006.93,1008 2140,1141.07 2140,1245.37 2114.1,1271.27 U6.10
  Bottom Layer w8: v1(1130.4,852) 1154,875.6 1154,996 v1(1145,1005)
NetU1_6: U1.6 U6.12 | length 1742.7
  Top Layer w8: U1.6 1099.21,646.61 1144.4,691.81 1144.4,820.4 1183,859 v1(1183,881) v1@1183,887
  Top Layer w10: v1(1185,975) 1205,955 1253,955 1274,976 2020.19,976 2172,1127.81 2172,1264.37 2125.73,1310.64 U6.12
  Bottom Layer w10: v1(1183,881) 1183,887 1175,895 1175,965 v1(1185,975)
NetU1_7: U1.7 U6.11 | length 1674
  Top Layer w8: U1.7 1093.42,621.02 1158.4,686.01 1158.4,814.6 1215,871.2 1215.2,871 v1(1221,871)
  Top Layer w10: v1(1244,987) 1249,992 2013.56,992 2156,1134.44 2156,1252 2117.04,1290.96 U6.11
  Bottom Layer w10: v1(1221,871) 1215.2,871 1215,871.2 1215,874 1221,880 1215,886 1215,955 1244,984 v1(1244,987)
NetU2_3: U2.3 U5.6 | length 980.3
  Top Layer w8: U5.6 184.41,1164.41 163,1143 163,1061.8 190.8,1034 575.8,1034 661,948.8 661,777.6 606.79,723.39 U2.3
NetU2_4: U2.4 U7.14 | length 1200.9
  Top Layer w8: U2.4 601,697.8 675,771.8 675,932 715,972 1053,972 v1(1065,960) ; U7.14 1021.41,1351.59 1034,1339 1034,1298 1073,1259 1073,1093.2 1045,1065.2 v1(1045,1045)
  Bottom Layer w8: v1(1045,1045) 1049,1041 1049,976 v1(1065,960)
NetU2_5: U2.5 U7.10 | length 1042.2
  Top Layer w8: U2.5 595.2,672.2 689,766 689,926.2 720.8,958 927,958 v1(950,935) ; v1(931,1013) 933.4,1013 1031,1110.6 1031,1241.6 999.76,1272.85 U7.10
  Bottom Layer w8: v1(931,1013) 931,954 v1(950,935)
NetU2_6: U2.6 U7.12 | length 1193.8
  Top Layer w8: U2.6 589.41,646.61 703,760.2 703,920.4 726.6,944 898,944 934,908 963,908 991,936 v1@1025,936 ; U7.12 999.98,1312.22 1059,1253.2 1059,1099 1005,1045 1005,1020 1020,1005 1022,1007 v1(1022,1013)
  Bottom Layer w8: v1(1022,1013) 1022,943 v1(1034,931)
NetU2_7: U2.7 U7.11 | length 1197.1
  Top Layer w8: U2.7 U2.7@583.62,621.02 ; U2.7@565,620 582.6,620 U2.7@583.62,621.02 ; U7.11 999.87,1292.53 1045,1247.4 1045,1104.8 980,1039.8 980,1013 v1(979,1014) ; v1@986.4,911.6 968.8,894 ; v1(997.8,902.2) 989.59,894 968.8,894 ; U2.7@583.62,621.02 717,754.4 717,914.6 732.4,930 892.2,930 928.2,894 968.8,894
  Bottom Layer w8: v1(979,1014) 979,921 v1(997.8,902.2)
NetU3_1: U3.1 U4.15 | length 305
  Top Layer w8: U3.1 1758.39,381.61 1746,394 1746,468 1760,482 1813,482 1847.99,516.99 U4.15
NetU3_2: U3.2 U4.12 | length 845.1
  Top Layer w8: U3.2 1847.8,407.2 1860,395 1860,360 1845,345 1586.06,345 1540,391.06 1540,471 1554,485 1670,485 1728,543 1793.2,543 1800.75,550.55 U4.12
NetU3_5: U3.5 U4.13 | length 234.6
  Top Layer w8: U3.5 1708.39,458.39 1718,468 1718,500.83 1739.17,522 1796,522 1816.5,542.5 U4.13
NetU3_6: U3.6 U4.14 | length 264.3
  Top Layer w8: U3.6 1702.8,432.8 1731,461 ; 1731,461.2 1731,461 ; U4.14 1832.24,537.24 1803,508 1744.97,508 1732,495.03 1732,462 1731,461
NetU4_7: U4.7 U5.9 | length 1942.1
  Top Layer w8: U5.9 399.41,1164.41 385,1150 385,1090 427,1048 582.6,1048 644.6,986 1031.77,986 1050.77,1005 v1(1080,1005) ; v1(1119,897) 1146,924 1282.84,924 1303.84,945 1677,945 v1(1707,915) ; v1(1684,652) v1@1688,652 ; U4.7 1701.5,638.5 v1@1688,652 ; v1@1688,652 1692,652 1695,655 1685,655 v1@1688,652
  Bottom Layer w8: v1(1080,1005) 1095,990 1095,935 1115,915 ; v1(1684,652) 1684,692.18 1697.5,705.68 1697.5,905.5 v1(1707,915)
NetU4_23: U4.23 U6.18 U7.18 | length 2883.3
  Top Layer w8: U7.18 1074.32,1430.33 1123.07,1381.57 1123.07,1288.07 1087,1252 1087,1057 1108,1036 1264.21,1036 1277.21,1023 1966,1023 1979,1036 v1(1980,1035) ; U4.23 1965,670 1965,668.23 2028.23,605 2135,605 2225,695 2225,780 2202.5,802.5 v1(2202.5,1027.5) 2210,1035 2210,1390 2171,1429 2065.06,1429 U6.18
  Bottom Layer w8: v1(1980,1035) 1975,1030 v1@2200,1030
NetU6_8: U6.8 U7.8 | length 1437.5
  Top Layer w8: U7.8 918.11,1202.89 928,1193 960,1193 984,1169 v1(984,1143) ; v1(1128,1076) 1154,1050 1270.01,1050 1283.01,1037 1920,1037 2011,1128 2011,1235.23 U6.8
  Bottom Layer w8: v1(984,1143) 1005,1164 1122,1164 1145,1141 1145,1093 v1(1128,1076)
VA+: C5.2 C6.2 C7.2 C8.2 C13.2 C14.2 C15.2 C16.2 C18.1 C20.1 C59.2 P3.1 R9.2 R13.2 U1.11 U1.14 U2.11 U2.14 U3.3 U4.3 U4.4 U4.24 U4.32 U8.1 | length 6820.7
  Top Layer w8: 1706.06,683 1708.8,685.75 1724.55,701.5 U4.3 ; U4.24 v1@1979.25,685.75
  Top Layer w10: U2.11 C15.2@840.39,646.61 ; U2.14 850.39,723.39 C13.2 905.4,728 C14.2 ; C15.2 C16.2@905.4,632 ; C16.2@912.4,625 C16.2 ; U1.14 C5.2@1355.39,723.39 ; v1(1590,660) 1608,678 1659,678 1664,683 1706.06,683 ; 1708.8,685.75 U4.4 ; v1(1765,915) 1765,865.76 1764.24,865 1772.24,865 1807.24,830 C20.1 1827.24,830 1832.24,825 U4.32 ; U3.3 1847.2,432.8 1860,420 1880,420 v1@1885,415
  Top Layer w15: U1.11 1345.39,646.61 C7.2 1410.4,632 C8.2 ; R9.2 v1(1632.24,647.24)
  Top Layer w20: C59.2 C59.2@1485,173.23 ; v1(1485,230) C59.2@1485,173.23 ; U8.1 C59.2@1485,173.23 ; v1(1932.24,412.24) R13.2
  Top Layer w25: C16.2@905.4,632 912.4,625 v1(970,625) ; C14.2 962.6,737.6 967,733.2 v1(967,731) ; C5.2@1355.39,723.39 C5.2 1364.6,732.6 v1(1477.4,732.6) ; C8.2 v1@1467.6,622.4
  Bottom Layer w20: v1(967,731) 967,733.2 962.6,737.6 1062.4,737.6 1095,705 1095,625 ; v1(970,625) 1095,625 ; v1(1440,190) 1615,190 1779,354 2086,354 2110,378 2110,462.57 2120,472.57 2120,475 2160,515 P3.1 ; v1(1440,230) 1420,250 1420,260 ; v1@1450,230 1420,260 ; v1@1450,235 1450,270 ; v1@1475,230 v1(1485,230) 1620,230 1802.24,412.24 v1(1932.24,412.24) ; v1(1477.4,732.6) 1475,730.2 v1(1475,620) 1475,615 1360,500 1360,360 1450,270 ; v1@1485,235 1505,255 1600,255 1750.5,405.5 1750.5,736.2 1770.8,756.5 1946.5,756.5 1990,713 v1(1990,685) ; v1(1590,660) 1590,610 1450,470 1450,270 ; 1095,625 1095,585 1420,260
  Bottom Layer w25: v1@1450,230 v1@1475,230 ; v1(1485,230) 1485,235 1485,455 1632.24,602.24 v1(1632.24,647.24) 1632.24,672.24 1675,715 1675,865 1660,880 1660,950 1680,970 1730,970 1765,935 v1(1765,915)
  other v1: 1484,190 1885,410
VBUS: C58.2 C60.2 P5.1 P6.6 U8.2 U9.2 | length 2979.1
  Top Layer w20: P6.6 120,279 120,215 301,34 1569.04,34 v1@1637.52,102.48 ; v1(1640,100) v1@1637.52,102.48 ; C58.2 1709.17,173.23 U8.2 v1@1637.52,102.48 ; C60.2@2436.61,490.98 C60.2
  Top Layer w75: C58.2 1742.4,172.4 1835,265 1875,265
  Bottom Layer w50: 1907.5,222.5 1959.61,170.39 2216.86,170.39 2262.97,216.5 2326.5,216.5 2402,292 2402,412 2437,412 v1(2450,425) v1(2415,425)
  Bottom Layer w75: 1907.5,222.5 1920,235
  other v1: 1890,250 1935,250
VD+: C17.2 C35.2 C36.1 C37.1 C38.1 C47.1 C48.1 C49.1 C61.2 R14.2 R15.2 R18.1 R19.1 R20.1 R21.2 R23.2 U3.7 U3.8 U5.1 U6.1 U6.4 U6.5 U6.19 U6.33 U7.1 U7.5 U7.7 U7.19 U7.33 U9.1 | length 10900.3
  Top Layer w8: R20.1 128,835 228,735 v1(240,735) ; v1@115,1130 R14.2 ; R18.1 v1(300,1080) ; R19.1 v1(728.07,1231.93)
  Top Layer w10: 95,1315 117.64,1292.36 U5.1 C35.2@211.65,1340 ; C35.2 C35.2@211.65,1340 ; v1(250,1335) 255,1340 C35.2@211.65,1340 ; C47.1@668.07,1386.57 678.07,1376.57 C48.1 C48.1@678.07,1331.9 ; C49.1@677.07,1297.57 C49.1@678.07,1296.57 ; C48.1@677.74,1331.9 C48.1@678.07,1331.9 ; C49.1 C48.1@678.07,1331.9 ; U7.1 780,1238.08 780,1331.9 ; U7.5 859.06,1286 ; 859.06,1331.56 859.06,1286 ; U7.7 898.43,1271.57 884,1286 859.06,1286 ; U7.19@937.07,1468.57 937.07,1408.57 860.4,1331.9 780,1331.9 ; C36.1@1760,1385 1770,1375 C37.1 C37.1@1770,1330.33 ; C38.1@1769,1296 C38.1@1770,1295 ; C37.1@1769.67,1330.33 C37.1@1770,1330.33 ; C38.1 C37.1@1770,1330.33 ; U6.1 1872.24,1328.09 1870,1330.33 ; U6.4 1931.3,1198.7 1935,1195 1945,1195 1950,1200 U6.5@1950,1240 ; U6.5 1950.98,1329.98 ; U6.19@2029,1467 2029,1407 1952.33,1330.33 1870,1330.33 ; C48.1@678.07,1331.9 U7.33 780,1331.9 ; C37.1@1770,1330.33 U6.33 1870,1330.33
  Top Layer w15: U3.8 1618.39,381.61 1600,400 1600,405 1602.2,407.2 U3.7
  Top Layer w20: U9.1 2436.61,719.02 C61.2
  Top Layer w25: R23.2 660.57,1446.57 v1(668.07,1439.07) ; v1(1570,405) C17.2@1600,405 ; R21.2 1752.5,1445 v1(1760,1437.5)
  Top Layer w40: C47.1 v1(668.07,1439.07) ; C36.1 v1(1760,1437.5)
  Bottom Layer w20: v1(250,1335) 255,1340 270,1325 410,1325 495,1240 495,1160
  Bottom Layer w25: v1(108,1124) 187,1124 210,1101 ; v1(240,735) 455,735 480,710 805,710 865.1,770.1 1069.9,770.1 1070,770 1170,770 1405,1005 1945,1005 1955,995 1960,995 ; v1(300,1080) 231,1080 210,1101 ; v1(668.07,1439.07) 731,1502 996,1502 1063,1435 1640,1435 1740,1335 1785,1335 ; v1(1570,405) 1675,405 1722,452 1722,748 1759,785 2035,785 2145,675 2290,675 2315,650 v1(2390,650) ; v1@2378,704 2087,995 1960,995 ; 210,1101 210,1183 329,1183 361.5,1150.5 630.5,1150.5 711.93,1231.93 v1(728.07,1231.93) 740.11,1231.93 758.68,1250.5 944.29,1250.5 956.29,1262.5 1128.29,1262.5 1340.79,1050 1905,1050 1960,995
  Bottom Layer w30: v1@1760,1440 v1(1760,1437.5) 1760,1360 1785,1335 1895,1225 2150,1225 2390,985 v1(2390,755)
  other v1: 2388,704
pads on no net: P5.0 P5.4 U4.5 U4.9 U4.31 U6.17 U6.28 U6.29 U6.31 U6.35 U6.36 U7.17 U7.28 U7.29 U7.31 U7.35 U7.36

## Polygon pours and split planes (outlines as drawn)
GND on Top Layer "Top_GND" (solid, remove dead copper, pour order 3): -135,1745 2745,1745 2745,1474.21 2745,25 -135,25
GND on Bottom Layer "Bot_GND" (solid, remove dead copper, pour order 4): -135,1745 2745,1745 2745,1474.21 2745,25 -135,25

## Keep-outs
Keep-Out Layer:
  circle w10: c120,1460 r50
  circle w10: c120,80 r50
  circle w10: c2440,80 r50
  circle w10: c2440,1455 r50

## Other copper
Top Layer:
  rectangle net VBUS: 1870,205 1970,305
  rectangle net VD+: 2375,630 2465,770
  rectangle net VA+: 1410,140 1515,255
  rectangle net GND: 501,54 1356,179
  rectangle net GND: 595,70 820,195
  rectangle net GND: 1790,1250 1810,1315
  rectangle net VBUS: 2400,400 2470,580
  rectangle net GND: 1565,230 1650,300
  pour cut-out: 2110,1095 2220,1095 2220,1365 2110.4,1365 2110.4,1100
  pour cut-out: 1890,325 1890,215 1955,215 1955,325
  pour cut-out: 1884.3,1615.81 2060.3,1615.81 2060.3,1465.81 1802.3,1465.81 1802.3,1645.81 1884.3,1645.81
  pour cut-out: 1884.3,1615.81 2060.3,1615.81 2060.3,1465.81 1802.3,1465.81 1802.3,1645.81 1884.3,1645.81
  pour cut-out: 1862,1476 1862,1439 1833,1439 1833,1476
  pour cut-out: 770.07,1477.57 770.07,1440.57 741.07,1440.57 741.07,1477.57
  pour cut-out: 792.37,1617.38 968.37,1617.38 968.37,1467.38 710.37,1467.38 710.37,1647.38 792.37,1647.38
  pour cut-out: 792.37,1617.38 968.37,1617.38 968.37,1467.38 710.37,1467.38 710.37,1647.38 792.37,1647.38
  pour cut-out: 2165,665 2165,620 2015,620 2015,665
  pour cut-out: 1642.24,780 1642.24,745 1720,745 1720,780
  pour cut-out: 2185,0 1890,0 1890,240 2185,240
  pour cut-out: 1120,1300 1120,1245 1055,1245 1055,1300
  pour cut-out: 1440,940 1300,940 1300,910 1440,910
  pour cut-out: 985,1435 985,1295 1115,1295 1115,1395 1055,1435
  pour cut-out: 1895,790 cw(c1955.36,729.64) 1955.36,815 2000.53,815 2000.53,730 1895.24,730 1895.24,732.01
Bottom Layer:
  rectangle net VBUS: 1870,200 1945,270
  rectangle net GND: 594,44 819,169
  rectangle net GND: 1054,45 1279,170
  rectangle net GND: 2090,240 2185,315
  rectangle net VA+: 1403,170 1512,294

## Silkscreen, mask and mechanical layers (free items; w line width, h text height)
Top Overlay:
  pour cut-out: 320,1100 320,1030 615,1030 615,1100
Bottom Overlay:
  drawing of 888 lines, arcs and shapes, not listed
  text "SEMICONDUCTOR" at 2605,743.79 h65 r90
  text "nRF2788" at 2655,740 h65 r90
  text "NORDIC" at 2551,739 h150 r90
  text "0004ANOL" at 2738,33 h30
Mechanical 1:
  lines w15: -155,0 -155,2000 ; -155,0 2755,0 ; -155,0 -155,2000 ; -155,0 2755,0 ; -155,0 -155,2000 ; -155,0 2755,0 ; -155,2000 2755,2000 ; -155,2000 2755,2000 ; -155,2000 2755,2000 ; 2755,0 2755,2000 ; 2755,0 2755,2000 ; 2755,0 2755,2000 ; 78.74,79.21 ccw(c118.11,79.21) 118.11,39.84 ccw(c118.11,79.21) 157.48,79.21 ccw(c118.11,79.21) 118.11,118.58 ccw(c118.11,79.21) 78.74,79.21 ; 78.74,1457.17 ccw(c118.11,1457.17) 118.11,1417.8 ccw(c118.11,1457.17) 157.48,1457.17 ccw(c118.11,1457.17) 118.11,1496.54 ccw(c118.11,1457.17) 78.74,1457.17 ; 2401.58,79.21 ccw(c2440.95,79.21) 2440.95,39.84 ccw(c2440.95,79.21) 2480.32,79.21 ccw(c2440.95,79.21) 2440.95,118.58 ccw(c2440.95,79.21) 2401.58,79.21 ; 2401.58,1457.17 ccw(c2440.95,1457.17) 2440.95,1417.8 ccw(c2440.95,1457.17) 2480.32,1457.17 ccw(c2440.95,1457.17) 2440.95,1496.54 ccw(c2440.95,1457.17) 2401.58,1457.17
Mechanical 4:
  drawing of 2631 lines, arcs and shapes, not listed

## Dimensions
-155,0 to 2755,0 on Top Overlay
2755,0 to 2755,2000 on Top Overlay

## Text inside footprints (layer, text, board x,y; h text height)
X1: Top Overlay "1" at 2027,819 h15 r90